# Altium PCB PCB_Clavier.PcbDoc (part 2 of 2)
Units mm, origin at the board's own origin, x right, y up, seen from the top; angles counter-clockwise.
Board outline 291.65 x 101.75 mm, 2 copper layers (Top Layer, Bottom Layer), stack 1.569 mm thick; 306 components, 204 nets, 1059 pads, 0 vias.
Unrouted connection lines stored in the file: 593.
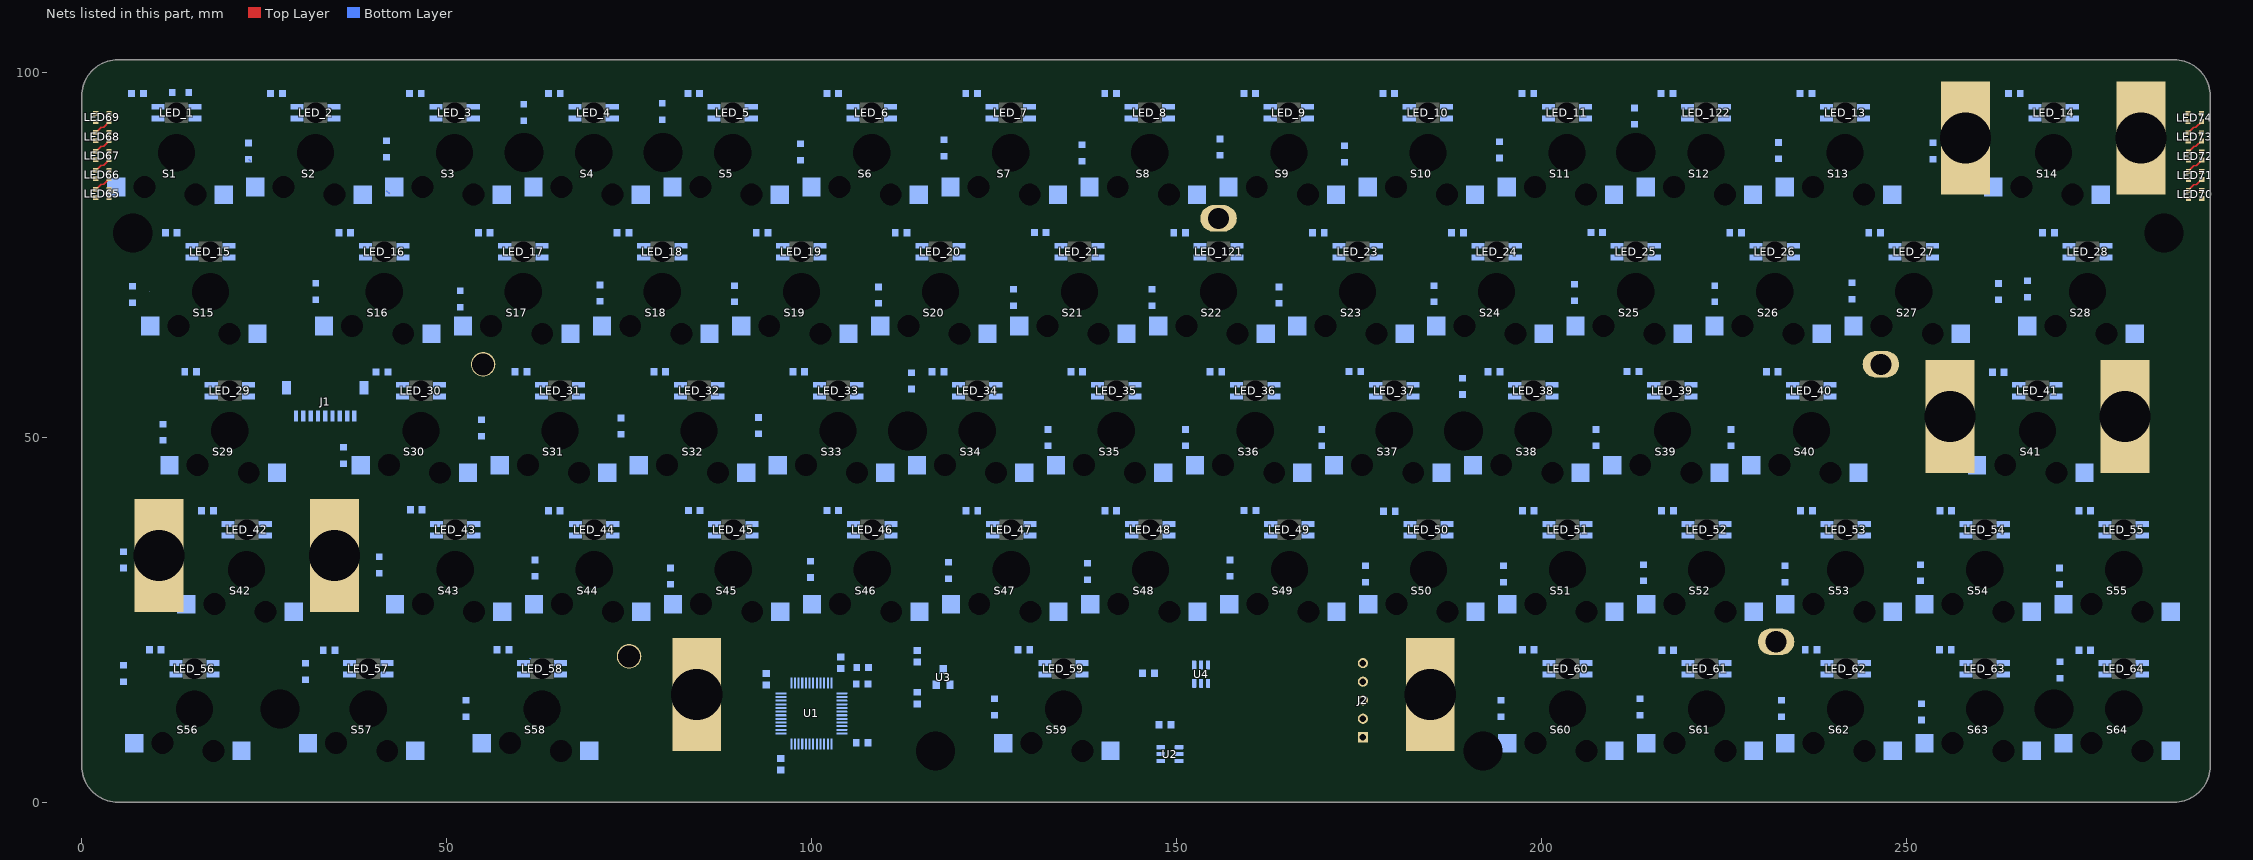
[diagram p2: the nets of this part, all layers, seen from the top]

## Part data
C1 C2 C3 C4 C5 C6 C7 C8 C_1 C_2 C_3 C_4 C_5 C_6 C_7 C_8 C_9 C_10 C_11 C_13 C_14 C_15 C_16 C_17 C_18 C_19 C_20 C_21 C_22 C_23 C_24 C_25 C_26 C_27 C_28 C_29 C_30 C_31 C_32 C_33 C_34 C_35 C_36 C_37 C_38 C_39 C_40 C_41 C_42 C_43 C_44 C_45 C_46 C_47 C_48 C_49 C_50 C_51 C_52 C_53 C_54 C_55 C_56 C_57 C_58 C_59 C_60 C_61 C_62 C_63 C_64 C_121: library part "CAP NP"
D1 D2 D3 D4 D5 D6 D7 D8 D9 D10 D11 D12 D13 D14 D15 D16 D17 D18 D19 D20 D21 D22 D23 D24 D25 D26 D27 D28 D29 D30 D31 D32 D33 D34 D35 D36 D37 D38 D39 D40 D41 D42 D43 D44 D45 D46 D47 D48 D49 D50 D51 D52 D53 D54 D55 D56 D57 D58 D59 D60 D61 D62 D63 D64: library part DIODE
J1: "Connector Header Surface Mount, Right Angle 9 position 0.039 (1.00mm)", Package=None, Check_prices=https://www.snapeda.com/parts/SM09B-SRSS-TB(LF)(SN)/JST/view-part/?ref=eda, MF="JST Sales America Inc.", MP=SM09B-SRSS-TB(LF)(SN), SnapEDA_Link=https://www.snapeda.com/parts/SM09B-SRSS-TB(LF)(SN)/JST/view-part/?ref=snap
J2: library part "HEADER 5"
LED65 LED66 LED67 LED68 LED69 LED70 LED71 LED72 LED73 LED74: "Intelligent control LED light source, SMD-4", Package=Package, Availability="Not in stock", Check_prices=https://www.snapeda.com/parts/WS2812-2020/Worldsemi/view-part/?ref=eda, MF=Worldsemi, MP=WS2812-2020, Price=None, SnapEDA_Link=https://www.snapeda.com/parts/WS2812-2020/Worldsemi/view-part/?ref=snap
MH1 MH2 MH3 MH4 MH5 MH6 MH7 MH8 MH9 MH10 MH11 MH12 MH13 MH14 MH15 MH16 MH17 MH18 MH19 MH20 MH21 MH22 MH23 MH24: library part "Mounting Hole"
R1 R2: library part R
S1 S2 S3 S4 S5 S6 S7 S8 S9 S10 S11 S12 S13 S14 S15 S16 S17 S18 S19 S20 S21 S22 S23 S24 S25 S26 S27 S28 S29 S30 S31 S32 S33 S34 S35 S36 S37 S38 S39 S40 S41 S42 S43 S44 S45 S46 S47 S48 S49 S50 S51 S52 S53 S54 S55 S56 S57 S58 S59 S60 S61 S62 S63 S64: library part "SW PUSHBUTTON"
U2 U4: "Single-Bit Dual-Supply Bus Transceiver with Configurable Voltage-Level Shifting and 3-State Outputs 6-SOT-23 -40 to 85", Package="SOT-23-6 Texas Instruments", Availability=Good, MF="Texas Instruments", MP=SN74LVC1T45DBVR, Price=None, Purchase-URL=https://pricing.snapeda.com/search/part/SN74LVC1T45DBVR/?ref=eda, SnapEDA_Link=https://www.snapeda.com/parts/SN74LVC1T45DBVR/Texas%20Instruments/view-part/106485/?ref=snap
  U2: Check_prices=https://www.snapeda.com/parts/SN74LVC1T45DBVR/Texas%20Instruments/view-part/106485/?ref=eda
U3: library part PMIC-LDO-XC6206P332MR-G(SOT23), "Linear Voltage Regulator IC Positive Fixed 1 Output 200mA SOT-23", Package="SOT-23-3 Torex", Availability="In Stock", Check_prices=https://www.snapeda.com/parts/XC6206P332MR-G/Torex/view-part/?ref=eda, MF=Torex, MP=XC6206P332MR-G, Price=None, Purchase-URL=https://pricing.snapeda.com/search/part/XC6206P332MR-G/?ref=eda, SnapEDA_Link=https://www.snapeda.com/parts/XC6206P332MR-G/Torex/view-part/?ref=snap

## Nets (pads, with @x,y where several pads share a name; then routed paths per layer and width w, separated by ;. In a path a pad name is that pad's centre, name@x,y a point inside that pad or via, vN(x,y) a via of type N, cw(c..) or ccw(c..) an arc to the next point about the centre after c; other vN are vias at no path point)
+3.3V: C1.1 C2.1 C3.1 C4.1 C5.1 C6.1 C8.1 J1.6 J2.1 U1.1 U1.9 U1.24 U1.36 U1.48 U2.1 U2.5 U3.2 U4.1 U4.5
\N\R\S\T\: J2.4 U1.7
BOOT0: J1.7 U1.44
GND: C1.2 C2.2 C3.2 C4.2 C5.2 C6.2 C7.2 C8.2 C_1.2 C_2.2 C_3.2 C_4.2 C_5.2 C_6.2 C_7.2 C_8.2 C_9.2 C_10.2 C_11.2 C_13.2 C_14.2 C_15.2 C_16.2 C_17.2 C_18.2 C_19.2 C_20.2 C_21.2 C_22.2 C_23.2 C_24.2 C_25.2 C_26.2 C_27.2 C_28.2 C_29.2 C_30.2 C_31.2 C_32.2 C_33.2 C_34.2 C_35.2 C_36.2 C_37.2 C_38.2 C_39.2 C_40.2 C_41.2 C_42.2 C_43.2 C_44.2 C_45.2 C_46.2 C_47.2 C_48.2 C_49.2 C_50.2 C_51.2 C_52.2 C_53.2 C_54.2 C_55.2 C_56.2 C_57.2 C_58.2 C_59.2 C_60.2 C_61.2 C_62.2 C_63.2 C_64.2 C_121.2 J1.S1 J1.S2 J2.5 LED65.2 LED66.2 LED67.2 LED68.2 LED69.2 LED70.2 LED71.2 LED72.2 LED73.2 LED74.2 LED_1.1 LED_2.1 LED_3.1 LED_4.1 LED_5.1 LED_6.1 LED_7.1 LED_8.1 LED_9.1 LED_10.1 LED_11.1 LED_13.1 LED_14.1 LED_15.1 LED_16.1 LED_17.1 LED_18.1 LED_19.1 LED_20.1 LED_21.1 LED_23.1 LED_24.1 LED_25.1 LED_26.1 LED_27.1 LED_28.1 LED_29.1 LED_30.1 LED_31.1 LED_32.1 LED_33.1 LED_34.1 LED_35.1 LED_36.1 LED_37.1 LED_38.1 LED_39.1 LED_40.1 LED_41.1 LED_42.1 LED_43.1 LED_44.1 LED_45.1 LED_46.1 LED_47.1 LED_48.1 LED_49.1 LED_50.1 LED_51.1 LED_52.1 LED_53.1 LED_54.1 LED_55.1 LED_56.1 LED_57.1 LED_58.1 LED_59.1 LED_60.1 LED_61.1 LED_62.1 LED_63.1 LED_64.1 LED_121.1 LED_122.1 MH11.1 MH12.1 MH13.1 MH14.1 MH15.1 U1.8 U1.23 U1.35 U1.47 U2.2 U3.1 U4.2
LEDS_O: LED_1.2 R1.2
LEDS_OUT: U1.38 U2.3
LEDS_STAT: U1.16 U4.3
NetD1_1: D1.1 S1.1
NetD2_1: D2.1 S2.1 | length 0.4
  Bottom Layer w0.2: D2.1@22.875,88.075 D2.1@23.145,87.805
NetD3_1: D3.1 S3.1 | length 0.6
  Bottom Layer w0.2: S3.1@41.75,83.795 S3.1@42.195,83.35
NetD4_1: D4.1 S4.1
NetD5_1: D5.1 S5.1
NetD6_1: D6.1 S6.1
NetD7_1: D7.1 S7.1
NetD8_1: D8.1 S8.1
NetD9_1: D9.1 S9.1
NetD10_1: D10.1 S10.1
NetD11_1: D11.1 S11.1
NetD12_1: D12.1 S12.1
NetD13_1: D13.1 S13.1
NetD14_1: D14.1 S14.1
NetD15_1: D15.1 S15.1 | length 0
  Bottom Layer w0.2: 9.295,69.95 9.295,69.975
NetD16_1: D16.1 S16.1
NetD17_1: D17.1 S17.1
NetD18_1: D18.1 S18.1
NetD19_1: D19.1 S19.1
NetD20_1: D20.1 S20.1
NetD21_1: D21.1 S21.1
NetD22_1: D22.1 S22.1
NetD23_1: D23.1 S23.1
NetD24_1: D24.1 S24.1
NetD25_1: D25.1 S25.1
NetD26_1: D26.1 S26.1
NetD27_1: D27.1 S27.1
NetD28_1: D28.1 S28.1
NetD29_1: D29.1 S29.1
NetD30_1: D30.1 S30.1
NetD31_1: D31.1 S31.1
NetD32_1: D32.1 S32.1
NetD33_1: D33.1 S33.1
NetD34_1: D34.1 S34.1
NetD35_1: D35.1 S35.1
NetD36_1: D36.1 S36.1
NetD37_1: D37.1 S37.1
NetD38_1: D38.1 S38.1
NetD39_1: D39.1 S39.1
NetD40_1: D40.1 S40.1
NetD41_1: D41.1 S41.1
NetD42_1: D42.1 S42.1
NetD43_1: D43.1 S43.1
NetD44_1: D44.1 S44.1
NetD45_1: D45.1 S45.1
NetD46_1: D46.1 S46.1
NetD47_1: D47.1 S47.1
NetD48_1: D48.1 S48.1
NetD49_1: D49.1 S49.1
NetD50_1: D50.1 S50.1
NetD51_1: D51.1 S51.1
NetD52_1: D52.1 S52.1
NetD53_1: D53.1 S53.1
NetD54_1: D54.1 S54.1
NetD55_1: D55.1 S55.1
NetD56_1: D56.1 S56.1
NetD57_1: D57.1 S57.1
NetD58_1: D58.1 S58.1
NetD59_1: D59.1 S59.1
NetD60_1: D60.1 S60.1
NetD61_1: D61.1 S61.1
NetD62_1: D62.1 S62.1
NetD63_1: D63.1 S63.1
NetD64_1: D64.1 S64.1
NetJ1_2: J1.2
NetLED65_1: LED65.1 LED66.3 | length 2.5
  Top Layer w0.2: LED65.1@1.935,83.95 2.685,84.7 3.015,84.7 LED66.3@3.765,85.45
NetLED65_3: LED65.3 R2.2
NetLED66_1: LED66.1 LED67.3 | length 2.5
  Top Layer w0.2: LED66.1@1.935,86.55 2.685,87.3 3.015,87.3 LED67.3@3.765,88.05
NetLED67_1: LED67.1 LED68.3 | length 2.5
  Top Layer w0.2: LED67.1@1.935,89.15 2.685,89.9 3.015,89.9 LED68.3@3.765,90.65
NetLED68_1: LED68.1 LED69.3 | length 2.5
  Top Layer w0.2: LED68.1@1.935,91.75 2.698,92.512 3.003,92.512 LED69.3@3.765,93.275
NetLED69_1: LED69.1 LED70.3
NetLED70_1: LED70.1 LED71.3 | length 2.5
  Top Layer w0.2: LED70.1@288.635,83.825 289.398,84.588 289.703,84.588 LED71.3@290.465,85.35
NetLED71_1: LED71.1 LED72.3 | length 2.5
  Top Layer w0.2: LED71.1@288.635,86.45 289.398,87.213 289.702,87.213 LED72.3@290.465,87.975
NetLED72_1: LED72.1 LED73.3 | length 2.5
  Top Layer w0.2: LED72.1@288.635,89.075 289.41,89.85 289.68,89.85 LED73.3@290.455,90.625
NetLED73_1: LED73.1 LED74.3 | length 2.4
  Top Layer w0.2: LED73.1@288.625,91.725 289.388,92.488 289.678,92.488 LED74.3@290.44,93.25
NetLED74_1: LED74.1
NetLED_2_2: LED_1.4 LED_2.2
NetLED_3_2: LED_2.4 LED_3.2
NetLED_4_2: LED_3.4 LED_4.2
NetLED_5_2: LED_4.4 LED_5.2
NetLED_6_2: LED_5.4 LED_6.2
NetLED_7_2: LED_6.4 LED_7.2
NetLED_8_2: LED_7.4 LED_8.2
NetLED_9_2: LED_8.4 LED_9.2
NetLED_10_2: LED_9.4 LED_10.2
NetLED_11_2: LED_10.4 LED_11.2
NetLED_13_2: LED_13.2 LED_122.4
NetLED_14_2: LED_13.4 LED_14.2
NetLED_15_2: LED_14.4 LED_15.2
NetLED_16_2: LED_15.4 LED_16.2
NetLED_17_2: LED_16.4 LED_17.2
NetLED_18_2: LED_17.4 LED_18.2
NetLED_19_2: LED_18.4 LED_19.2
NetLED_20_2: LED_19.4 LED_20.2
NetLED_21_2: LED_20.4 LED_21.2
NetLED_23_2: LED_23.2 LED_121.4
NetLED_24_2: LED_23.4 LED_24.2
NetLED_25_2: LED_24.4 LED_25.2
NetLED_26_2: LED_25.4 LED_26.2
NetLED_27_2: LED_26.4 LED_27.2
NetLED_28_2: LED_27.4 LED_28.2
NetLED_29_2: LED_28.4 LED_29.2
NetLED_30_2: LED_29.4 LED_30.2
NetLED_31_2: LED_30.4 LED_31.2
NetLED_32_2: LED_31.4 LED_32.2
NetLED_33_2: LED_32.4 LED_33.2
NetLED_34_2: LED_33.4 LED_34.2
NetLED_35_2: LED_34.4 LED_35.2
NetLED_36_2: LED_35.4 LED_36.2
NetLED_37_2: LED_36.4 LED_37.2
NetLED_38_2: LED_37.4 LED_38.2
NetLED_39_2: LED_38.4 LED_39.2
NetLED_40_2: LED_39.4 LED_40.2
NetLED_41_2: LED_40.4 LED_41.2
NetLED_42_2: LED_41.4 LED_42.2
NetLED_43_2: LED_42.4 LED_43.2
NetLED_44_2: LED_43.4 LED_44.2
NetLED_45_2: LED_44.4 LED_45.2
NetLED_46_2: LED_45.4 LED_46.2
NetLED_47_2: LED_46.4 LED_47.2
NetLED_48_2: LED_47.4 LED_48.2
NetLED_49_2: LED_48.4 LED_49.2
NetLED_50_2: LED_49.4 LED_50.2
NetLED_51_2: LED_50.4 LED_51.2
NetLED_52_2: LED_51.4 LED_52.2
NetLED_53_2: LED_52.4 LED_53.2
NetLED_54_2: LED_53.4 LED_54.2
NetLED_55_2: LED_54.4 LED_55.2
NetLED_56_2: LED_55.4 LED_56.2
NetLED_57_2: LED_56.4 LED_57.2
NetLED_58_2: LED_57.4 LED_58.2
NetLED_59_2: LED_58.4 LED_59.2
NetLED_60_2: LED_59.4 LED_60.2
NetLED_61_2: LED_60.4 LED_61.2
NetLED_62_2: LED_61.4 LED_62.2
NetLED_63_2: LED_62.4 LED_63.2
NetLED_64_2: LED_63.4 LED_64.2
NetLED_64_4: LED_64.4
NetLED_121_2: LED_21.4 LED_121.2
NetLED_122_2: LED_11.4 LED_122.2
NetMH1_1: MH1.1
NetMH2_1: MH2.1
NetMH3_1: MH3.1
NetMH4_1: MH4.1
NetMH5_1: MH5.1
NetMH6_1: MH6.1
NetMH7_1: MH7.1
NetMH8_1: MH8.1
NetMH9_1: MH9.1
NetMH10_1: MH10.1
NetMH16_1: MH16.1
NetMH17_1: MH17.1
NetMH18_1: MH18.1
NetMH19_1: MH19.1
NetMH20_1: MH20.1
NetMH21_1: MH21.1
NetMH22_1: MH22.1
NetMH23_1: MH23.1
NetMH24_1: MH24.1
NetR1_1: R1.1 U2.4
NetR2_1: R2.1 U4.4
NetS1_2: S1.2 S15.2 S29.2 S42.2 S56.2 U1.18 | length 0
  Bottom Layer w0.2: S1.2@18.805,82.275 S1.2@18.805,82.3
NetS2_2: S2.2 S16.2 S30.2 S43.2 S57.2 U1.19
NetS3_2: S3.2 S17.2 S31.2 S44.2 S58.2 U1.20
NetS4_2: S4.2 S18.2 S32.2 S45.2 U1.39
NetS5_2: S5.2 S19.2 S33.2 S46.2 U1.40
NetS6_2: S6.2 S20.2 S34.2 S47.2 S59.2 U1.41
NetS7_2: S7.2 S21.2 S35.2 S48.2 U1.42
NetS8_2: S8.2 S22.2 S36.2 S49.2 U1.43
NetS9_2: S9.2 S23.2 S37.2 S50.2 U1.45
NetS10_2: S10.2 S24.2 S38.2 S51.2 S60.2 U1.46
NetS11_2: S11.2 S25.2 S39.2 S52.2 S61.2 U1.21
NetS12_2: S12.2 S26.2 S40.2 S53.2 S62.2 U1.22
NetS13_2: S13.2 S27.2 S54.2 S63.2 U1.25
NetS14_2: S14.2 S28.2 S41.2 S55.2 S64.2 U1.26
NetU1_2: U1.2
NetU1_3: U1.3
NetU1_4: U1.4
NetU1_5: U1.5
NetU1_6: U1.6
NetU1_15: U1.15
NetU1_27: U1.27
NetU1_28: U1.28
NetU1_31: U1.31
OS_1: J1.3 U1.17
OS_2: J1.4 U1.29
OS_3: J1.5 U1.30
ROW1: D1.2 D2.2 D3.2 D4.2 D5.2 D6.2 D7.2 D8.2 D9.2 D10.2 D11.2 D12.2 D13.2 D14.2 U1.10
ROW2: D15.2 D16.2 D17.2 D18.2 D19.2 D20.2 D21.2 D22.2 D23.2 D24.2 D25.2 D26.2 D27.2 D28.2 U1.11
ROW3: D29.2 D30.2 D31.2 D32.2 D33.2 D34.2 D35.2 D36.2 D37.2 D38.2 D39.2 D40.2 D41.2 U1.12
ROW4: D42.2 D43.2 D44.2 D45.2 D46.2 D47.2 D48.2 D49.2 D50.2 D51.2 D52.2 D53.2 D54.2 D55.2 U1.13
ROW5: D56.2 D57.2 D58.2 D59.2 D60.2 D61.2 D62.2 D63.2 D64.2 U1.14
SWCLK: J2.3 U1.37
SWDIO: J2.2 U1.34
USBD_+: J1.9 U1.33
USBD_-: J1.8 U1.32 | length 0.1
  Bottom Layer w0.125: 61.398,19.748 61.471,19.675 ; U1.32@95.894,13.003 U1.32@95.898,12.998
VBUS: C7.1 C_1.1 C_2.1 C_3.1 C_4.1 C_5.1 C_6.1 C_7.1 C_8.1 C_9.1 C_10.1 C_11.1 C_13.1 C_14.1 C_15.1 C_16.1 C_17.1 C_18.1 C_19.1 C_20.1 C_21.1 C_22.1 C_23.1 C_24.1 C_25.1 C_26.1 C_27.1 C_28.1 C_29.1 C_30.1 C_31.1 C_32.1 C_33.1 C_34.1 C_35.1 C_36.1 C_37.1 C_38.1 C_39.1 C_40.1 C_41.1 C_42.1 C_43.1 C_44.1 C_45.1 C_46.1 C_47.1 C_48.1 C_49.1 C_50.1 C_51.1 C_52.1 C_53.1 C_54.1 C_55.1 C_56.1 C_57.1 C_58.1 C_59.1 C_60.1 C_61.1 C_62.1 C_63.1 C_64.1 C_121.1 J1.1 LED65.4 LED66.4 LED67.4 LED68.4 LED69.4 LED70.4 LED71.4 LED72.4 LED73.4 LED74.4 LED_1.3 LED_2.3 LED_3.3 LED_4.3 LED_5.3 LED_6.3 LED_7.3 LED_8.3 LED_9.3 LED_10.3 LED_11.3 LED_13.3 LED_14.3 LED_15.3 LED_16.3 LED_17.3 LED_18.3 LED_19.3 LED_20.3 LED_21.3 LED_23.3 LED_24.3 LED_25.3 LED_26.3 LED_27.3 LED_28.3 LED_29.3 LED_30.3 LED_31.3 LED_32.3 LED_33.3 LED_34.3 LED_35.3 LED_36.3 LED_37.3 LED_38.3 LED_39.3 LED_40.3 LED_41.3 LED_42.3 LED_43.3 LED_44.3 LED_45.3 LED_46.3 LED_47.3 LED_48.3 LED_49.3 LED_50.3 LED_51.3 LED_52.3 LED_53.3 LED_54.3 LED_55.3 LED_56.3 LED_57.3 LED_58.3 LED_59.3 LED_60.3 LED_61.3 LED_62.3 LED_63.3 LED_64.3 LED_121.3 LED_122.3 U2.6 U3.3 U4.6
pads on no net: LED_1.0 LED_2.0 LED_3.0 LED_4.0 LED_5.0 LED_6.0 LED_7.0 LED_8.0 LED_9.0 LED_10.0 LED_11.0 LED_13.0 LED_14.0 LED_15.0 LED_16.0 LED_17.0 LED_18.0 LED_19.0 LED_20.0 LED_21.0 LED_23.0 LED_24.0 LED_25.0 LED_26.0 LED_27.0 LED_28.0 LED_29.0 LED_30.0 LED_31.0 LED_32.0 LED_33.0 LED_34.0 LED_35.0 LED_36.0 LED_37.0 LED_38.0 LED_39.0 LED_40.0 LED_41.0 LED_42.0 LED_43.0 LED_44.0 LED_45.0 LED_46.0 LED_47.0 LED_48.0 LED_49.0 LED_50.0 LED_51.0 LED_52.0 LED_53.0 LED_54.0 LED_55.0 LED_56.0 LED_57.0 LED_58.0 LED_59.0 LED_60.0 LED_61.0 LED_62.0 LED_63.0 LED_64.0 LED_121.0 LED_122.0 S1.0 S2.0 S3.0 S4.0 S5.0 S6.0 S7.0 S8.0 S9.0 S10.0 S11.0 S12.0 S13.0 S14.0 S15.0 S16.0 S17.0 S18.0 S19.0 S20.0 S21.0 S22.0 S23.0 S24.0 S25.0 S26.0 S27.0 S28.0 S29.0 S30.0 S31.0 S32.0 S33.0 S34.0 S35.0 S36.0 S37.0 S38.0 S39.0 S40.0 S41.0 S42.0 S43.0 S44.0 S45.0 S46.0 S47.0 S48.0 S49.0 S50.0 S51.0 S52.0 S53.0 S54.0 S55.0 S56.0 S57.0 S58.0 S59.0 S60.0 S61.0 S62.0 S63.0 S64.0

## Silkscreen, mask and mechanical layers (free items; w line width, h text height)
Top Overlay:
  text ".NomDeProjet" at 48,-3.718 h1.5
  text ".Revision" at 50,-4.983 h1.5
Board:
  the board outline again, w0.2
Drill Drawing:
  circle w0.254: c163.74,-24.254 r0.689
  lines w0.25: 86.705,-37 92.976,-37 108.963,-37 117.909,-37 125.025,-37 ; 86.705,-34 92.976,-34 108.963,-34 117.909,-34 125.025,-34 ; 86.705,-31 92.976,-31 108.963,-31 117.909,-31 125.025,-31 ; 86.705,-28 92.976,-28 108.963,-28 117.909,-28 125.025,-28 ; 86.705,-25 92.976,-25 108.963,-25 117.909,-25 125.025,-25 ; 86.705,-22 92.976,-22 108.963,-22 117.909,-22 125.025,-22 ; 86.705,-19 92.976,-19 108.963,-19 117.909,-19 125.025,-19 ; 86.705,-16 92.976,-16 108.963,-16 117.909,-16 125.025,-16 ; 86.705,-13 125.025,-13 ; 92.976,-10 92.976,-40 ; 108.963,-10 108.963,-40 ; 117.909,-10 117.909,-40 ; 161.799,-38.285 256.681,-38.285 ; 161.799,-13.463 256.681,-13.463 ; 169.762,-41.388 169.762,-10.361 ; 177.073,-41.388 177.073,-10.361 ; 191.5,-41.388 191.5,-10.361 ; 197.677,-41.388 197.677,-10.361 ; 206.663,-41.388 206.663,-10.361 ; 223.699,-41.388 223.699,-10.361 ; 231.064,-41.388 231.064,-10.361 ; 240.683,-41.388 240.683,-10.361 ; 92.976,-40 86.705,-40 86.705,-10 125.025,-10 125.025,-40 117.909,-40 ; 92.976,-40 108.963,-40 ; 108.963,-40 117.909,-40 ; 161.799,-41.388 256.681,-41.388 256.681,-10.361 161.799,-10.361 161.799,-41.388
  lines w0.254: 163.05,-37.354 163.05,-37.009 163.395,-36.665 163.05,-36.32 163.05,-35.975 163.395,-35.975 163.74,-36.32 164.084,-35.975 164.429,-35.975 164.429,-36.32 164.084,-36.665 164.429,-37.009 164.429,-37.354 164.084,-37.354 163.74,-37.009 163.395,-37.354 163.05,-37.354 ; 163.05,-34.251 163.74,-33.907 164.429,-34.251 164.084,-33.562 164.429,-32.873 163.74,-33.217 163.05,-32.873 163.395,-33.562 163.05,-34.251 ; 163.05,-31.149 164.429,-31.149 164.429,-29.77 163.05,-29.77 163.05,-31.149 ; 163.05,-27.701 163.395,-27.701 163.395,-28.046 164.084,-28.046 164.084,-27.701 164.429,-27.701 164.429,-27.012 164.084,-27.012 164.084,-26.667 163.395,-26.667 163.395,-27.012 163.05,-27.012 163.05,-27.701 ; 163.05,-21.496 163.395,-21.496 163.74,-21.841 164.084,-21.496 164.429,-21.496 164.084,-21.151 164.429,-20.807 164.084,-20.807 163.74,-20.462 163.395,-20.807 163.05,-20.807 163.395,-21.151 163.05,-21.496 ; 163.05,-17.359 164.429,-17.359 163.74,-18.738 163.05,-17.359 ; 163.05,-14.946 163.74,-15.635 164.429,-14.946 163.74,-14.256 163.05,-14.946
  text "Layer" at 88.205,-12.25 h1.5
  text "Name" at 94.476,-12.25 h1.5
  text "Thickness" at 110.463,-12.25 h1.5
  text "Gerber" at 119.409,-12.25 h1.5
  text "Symbol" at 163.66,-12.533 h1.8
  text "Count" at 170.693,-12.533 h1.8
  text "Hole Size" at 178.004,-12.533 h1.8
  text "Plated" at 192.431,-12.533 h1.8
  text "Hole Type" at 198.608,-12.533 h1.8
  text "Drill Layer Pair" at 207.593,-12.533 h1.8
  text "Via/Pad" at 224.629,-12.533 h1.8
  text "Pad Shape" at 231.995,-12.533 h1.8
  text "Hole Length" at 241.614,-12.533 h1.8
  text "Top Overlay" at 94.476,-15.25 h1.5
  text "GTO" at 119.409,-15.25 h1.5
  text "5" at 170.693,-15.635 h1.5
  text "0.890mm (35.04mil)" at 178.004,-15.635 h1.5
  text "PTH" at 192.431,-15.635 h1.5
  text "Round" at 198.608,-15.635 h1.5
  text "Top Layer - Bottom Layer" at 207.593,-15.635 h1.5
  text "Pad" at 224.629,-15.635 h1.5
  text "Rounded" at 231.995,-15.635 h1.5
  text "-" at 241.614,-15.635 h1.5
  text "Top Solder" at 94.476,-18.25 h1.5
  text "0.025mm" at 110.463,-18.25 h1.5
  text "GTS" at 119.409,-18.25 h1.5
  text "64" at 170.693,-18.738 h1.5
  text "2.800mm (110.24mil)" at 178.004,-18.738 h1.5
  text "NPTH" at 192.431,-18.738 h1.5
  text "Rectangle" at 198.608,-18.738 h1.5
  text "Top Layer - Bottom Layer" at 207.593,-18.738 h1.5
  text "Pad" at 224.629,-18.738 h1.5
  text "Rounded" at 231.995,-18.738 h1.5
  text "3.200mm (125.98mil)" at 241.614,-18.738 h1.5
  text "Top Surface Finish" at 94.476,-21.25 h1.5
  text "0.020mm" at 110.463,-21.25 h1.5
  text "3" at 170.693,-21.841 h1.5
  text "2.900mm (114.17mil)" at 178.004,-21.841 h1.5
  text "PTH" at 192.431,-21.841 h1.5
  text "Slot" at 198.608,-21.841 h1.5
  text "Top Layer - Bottom Layer" at 207.593,-21.841 h1.5
  text "Pad" at 224.629,-21.841 h1.5
  text "Rounded" at 231.995,-21.841 h1.5
  text "3.900mm (153.54mil)" at 241.614,-21.841 h1.5
  text "1" at 88.205,-24.25 h1.5
  text "Top Layer" at 94.476,-24.25 h1.5
  text "0.035mm" at 110.463,-24.25 h1.5
  text "GTL" at 119.409,-24.25 h1.5
  text "128" at 170.693,-24.943 h1.5
  text "3.000mm (118.11mil)" at 178.004,-24.943 h1.5
  text "NPTH" at 192.431,-24.943 h1.5
  text "Round" at 198.608,-24.943 h1.5
  text "Top Layer - Bottom Layer" at 207.593,-24.943 h1.5
  text "Pad" at 224.629,-24.943 h1.5
  text "Rounded" at 231.995,-24.943 h1.5
  text "-" at 241.614,-24.943 h1.5
  text "Dielectric 1" at 94.476,-27.25 h1.5
  text "1.499mm" at 110.463,-27.25 h1.5
  text "2" at 170.693,-28.046 h1.5
  text "3.000mm (118.11mil)" at 178.004,-28.046 h1.5
  text "PTH" at 192.431,-28.046 h1.5
  text "Round" at 198.608,-28.046 h1.5
  text "Top Layer - Bottom Layer" at 207.593,-28.046 h1.5
  text "Pad" at 224.629,-28.046 h1.5
  text "Rounded" at 231.995,-28.046 h1.5
  text "-" at 241.614,-28.046 h1.5
  text "2" at 88.204,-30.25 h1.5
  text "Bottom Layer" at 94.476,-30.25 h1.5
  text "0.035mm" at 110.463,-30.25 h1.5
  text "GBL" at 119.409,-30.25 h1.5
  text "64" at 170.693,-31.149 h1.5
  text "5.100mm (200.79mil)" at 178.004,-31.149 h1.5
  text "NPTH" at 192.431,-31.149 h1.5
  text "Round" at 198.608,-31.149 h1.5
  text "Top Layer - Bottom Layer" at 207.593,-31.149 h1.5
  text "Pad" at 224.629,-31.149 h1.5
  text "Rounded" at 231.995,-31.149 h1.5
  text "-" at 241.614,-31.149 h1.5
  text "Bottom Surface Finish" at 94.476,-33.25 h1.5
  text "0.020mm" at 110.463,-33.25 h1.5
  text "11" at 170.693,-34.251 h1.5
  text "5.350mm (210.63mil)" at 178.004,-34.251 h1.5
  text "NPTH" at 192.431,-34.251 h1.5
  text "Round" at 198.608,-34.251 h1.5
  text "Top Layer - Bottom Layer" at 207.593,-34.251 h1.5
  text "Pad" at 224.629,-34.251 h1.5
  text "Rounded" at 231.995,-34.251 h1.5
  text "-" at 241.614,-34.251 h1.5
  text "Bottom Solder" at 94.476,-36.25 h1.5
  text "0.025mm" at 110.463,-36.25 h1.5
  text "GBS" at 119.409,-36.25 h1.5
  text "8" at 170.693,-37.354 h1.5
  text "7.000mm (275.59mil)" at 178.004,-37.354 h1.5
  text "NPTH" at 192.431,-37.354 h1.5
  text "Rectangle" at 198.608,-37.354 h1.5
  text "Top Layer - Bottom Layer" at 207.593,-37.354 h1.5
  text "Pad" at 224.629,-37.354 h1.5
  text "Rectangle" at 231.995,-37.354 h1.5
  text "15.850mm (624.02mil)" at 241.614,-37.354 h1.5
  text "Bottom Overlay" at 94.476,-39.25 h1.5
  text "GBO" at 119.409,-39.25 h1.5
  text "285 Total" at 170.693,-40.457 h1.5
  text "Total board thickness:" at 88.205,-42.25 h1.5
  text "1.659mm" at 110.463,-42.25 h1.5
  text "Slot definitions :" at 163.66,-42.629 h1.5
  text "Routed Path Length" at 173.87,-42.629 h1.5
  text "= Calculated from tool start centre position to tool end centre position." at 186.52,-42.629 h1.5
  text "Hole Length" at 173.87,-43.87 h1.5
  text "= Routed Path Length + Tool Size = Slot length as defined in the PCB layout" at 181.824,-43.87 h1.5

## Dimensions
0,96.75 to 291.65,96.75 on Drill Drawing
5,0 to 5,101.75 on Drill Drawing

## Text inside footprints (layer, text, board x,y; h text height)
LED_1: Bottom Overlay "VDD" at 9.444,94.881 h0.89; Bottom Overlay "DOUT" at 9.444,93.23 h0.89; Bottom Overlay "DIN" at 18.842,94.881 h0.89; Bottom Overlay "GND" at 18.969,93.23 h0.89
LED_2: Bottom Overlay "VDD" at 28.494,94.881 h0.89; Bottom Overlay "DOUT" at 28.494,93.23 h0.89; Bottom Overlay "DIN" at 37.892,94.881 h0.89; Bottom Overlay "GND" at 38.019,93.23 h0.89
LED_3: Bottom Overlay "VDD" at 47.544,94.881 h0.89; Bottom Overlay "DOUT" at 47.544,93.23 h0.89; Bottom Overlay "DIN" at 56.942,94.881 h0.89; Bottom Overlay "GND" at 57.069,93.23 h0.89
LED_4: Bottom Overlay "VDD" at 66.594,94.881 h0.89; Bottom Overlay "DOUT" at 66.594,93.23 h0.89; Bottom Overlay "DIN" at 75.992,94.881 h0.89; Bottom Overlay "GND" at 76.119,93.23 h0.89
LED_5: Bottom Overlay "VDD" at 85.644,94.881 h0.89; Bottom Overlay "DOUT" at 85.644,93.23 h0.89; Bottom Overlay "DIN" at 95.042,94.881 h0.89; Bottom Overlay "GND" at 95.169,93.23 h0.89
LED_6: Bottom Overlay "VDD" at 104.694,94.881 h0.89; Bottom Overlay "DOUT" at 104.694,93.23 h0.89; Bottom Overlay "DIN" at 114.092,94.881 h0.89; Bottom Overlay "GND" at 114.219,93.23 h0.89
LED_7: Bottom Overlay "VDD" at 123.744,94.881 h0.89; Bottom Overlay "DOUT" at 123.744,93.23 h0.89; Bottom Overlay "DIN" at 133.142,94.881 h0.89; Bottom Overlay "GND" at 133.269,93.23 h0.89
LED_8: Bottom Overlay "VDD" at 142.794,94.881 h0.89; Bottom Overlay "DOUT" at 142.794,93.23 h0.89; Bottom Overlay "DIN" at 152.192,94.881 h0.89; Bottom Overlay "GND" at 152.319,93.23 h0.89
LED_9: Bottom Overlay "VDD" at 161.844,94.881 h0.89; Bottom Overlay "DOUT" at 161.844,93.23 h0.89; Bottom Overlay "DIN" at 171.242,94.881 h0.89; Bottom Overlay "GND" at 171.369,93.23 h0.89
LED_10: Bottom Overlay "VDD" at 180.894,94.881 h0.89; Bottom Overlay "DOUT" at 180.894,93.23 h0.89; Bottom Overlay "DIN" at 190.292,94.881 h0.89; Bottom Overlay "GND" at 190.419,93.23 h0.89
LED_11: Bottom Overlay "VDD" at 199.944,94.881 h0.89; Bottom Overlay "DOUT" at 199.944,93.23 h0.89; Bottom Overlay "DIN" at 209.342,94.881 h0.89; Bottom Overlay "GND" at 209.469,93.23 h0.89
LED_13: Bottom Overlay "VDD" at 238.044,94.881 h0.89; Bottom Overlay "DOUT" at 238.044,93.23 h0.89; Bottom Overlay "DIN" at 247.442,94.881 h0.89; Bottom Overlay "GND" at 247.569,93.23 h0.89
LED_14: Bottom Overlay "GND" at 276.144,93.23 h0.89; Bottom Overlay "DIN" at 276.017,94.881 h0.89; Bottom Overlay "DOUT" at 266.619,93.23 h0.89; Bottom Overlay "VDD" at 266.619,94.881 h0.89
LED_15: Bottom Overlay "VDD" at 14.094,75.831 h0.89; Bottom Overlay "DOUT" at 14.094,74.18 h0.89; Bottom Overlay "DIN" at 23.492,75.831 h0.89; Bottom Overlay "GND" at 23.619,74.18 h0.89
LED_16: Bottom Overlay "VDD" at 37.907,75.831 h0.89; Bottom Overlay "DOUT" at 37.907,74.18 h0.89; Bottom Overlay "DIN" at 47.305,75.831 h0.89; Bottom Overlay "GND" at 47.432,74.18 h0.89
LED_17: Bottom Overlay "VDD" at 56.957,75.831 h0.89; Bottom Overlay "DOUT" at 56.957,74.18 h0.89; Bottom Overlay "DIN" at 66.355,75.831 h0.89; Bottom Overlay "GND" at 66.482,74.18 h0.89
LED_18: Bottom Overlay "VDD" at 76.007,75.831 h0.89; Bottom Overlay "DOUT" at 76.007,74.18 h0.89; Bottom Overlay "DIN" at 85.405,75.831 h0.89; Bottom Overlay "GND" at 85.532,74.18 h0.89
LED_19: Bottom Overlay "VDD" at 95.057,75.831 h0.89; Bottom Overlay "DOUT" at 95.057,74.18 h0.89; Bottom Overlay "DIN" at 104.455,75.831 h0.89; Bottom Overlay "GND" at 104.582,74.18 h0.89
LED_20: Bottom Overlay "VDD" at 114.107,75.831 h0.89; Bottom Overlay "DOUT" at 114.107,74.18 h0.89; Bottom Overlay "DIN" at 123.505,75.831 h0.89; Bottom Overlay "GND" at 123.632,74.18 h0.89
LED_21: Bottom Overlay "VDD" at 133.157,75.831 h0.89; Bottom Overlay "DOUT" at 133.157,74.18 h0.89; Bottom Overlay "DIN" at 142.555,75.831 h0.89; Bottom Overlay "GND" at 142.682,74.18 h0.89
LED_23: Bottom Overlay "VDD" at 171.257,75.831 h0.89; Bottom Overlay "DOUT" at 171.257,74.18 h0.89; Bottom Overlay "DIN" at 180.655,75.831 h0.89; Bottom Overlay "GND" at 180.782,74.18 h0.89
LED_24: Bottom Overlay "VDD" at 190.307,75.831 h0.89; Bottom Overlay "DOUT" at 190.307,74.18 h0.89; Bottom Overlay "DIN" at 199.705,75.831 h0.89; Bottom Overlay "GND" at 199.832,74.18 h0.89
LED_25: Bottom Overlay "VDD" at 209.357,75.831 h0.89; Bottom Overlay "DOUT" at 209.357,74.18 h0.89; Bottom Overlay "DIN" at 218.755,75.831 h0.89; Bottom Overlay "GND" at 218.882,74.18 h0.89
LED_26: Bottom Overlay "VDD" at 228.407,75.831 h0.89; Bottom Overlay "DOUT" at 228.407,74.18 h0.89; Bottom Overlay "DIN" at 237.805,75.831 h0.89; Bottom Overlay "GND" at 237.932,74.18 h0.89
LED_27: Bottom Overlay "VDD" at 247.457,75.831 h0.89; Bottom Overlay "DOUT" at 247.457,74.18 h0.89; Bottom Overlay "DIN" at 256.855,75.831 h0.89; Bottom Overlay "GND" at 256.982,74.18 h0.89
LED_28: Bottom Overlay "VDD" at 271.269,75.831 h0.89; Bottom Overlay "DOUT" at 271.269,74.18 h0.89; Bottom Overlay "DIN" at 280.667,75.831 h0.89; Bottom Overlay "GND" at 280.794,74.18 h0.89
LED_29: Bottom Overlay "VDD" at 16.744,56.781 h0.89; Bottom Overlay "DOUT" at 16.744,55.13 h0.89; Bottom Overlay "DIN" at 26.142,56.781 h0.89; Bottom Overlay "GND" at 26.269,55.13 h0.89
LED_30: Bottom Overlay "VDD" at 42.938,56.781 h0.89; Bottom Overlay "DOUT" at 42.938,55.13 h0.89; Bottom Overlay "DIN" at 52.336,56.781 h0.89; Bottom Overlay "GND" at 52.463,55.13 h0.89
LED_31: Bottom Overlay "VDD" at 61.988,56.781 h0.89; Bottom Overlay "DOUT" at 61.988,55.13 h0.89; Bottom Overlay "DIN" at 71.386,56.781 h0.89; Bottom Overlay "GND" at 71.513,55.13 h0.89
LED_32: Bottom Overlay "VDD" at 81.038,56.781 h0.89; Bottom Overlay "DOUT" at 81.038,55.13 h0.89; Bottom Overlay "DIN" at 90.436,56.781 h0.89; Bottom Overlay "GND" at 90.563,55.13 h0.89
LED_33: Bottom Overlay "VDD" at 100.088,56.781 h0.89; Bottom Overlay "DOUT" at 100.088,55.13 h0.89; Bottom Overlay "DIN" at 109.486,56.781 h0.89; Bottom Overlay "GND" at 109.613,55.13 h0.89
LED_34: Bottom Overlay "VDD" at 119.138,56.781 h0.89; Bottom Overlay "DOUT" at 119.138,55.13 h0.89; Bottom Overlay "DIN" at 128.536,56.781 h0.89; Bottom Overlay "GND" at 128.663,55.13 h0.89
LED_35: Bottom Overlay "VDD" at 138.188,56.781 h0.89; Bottom Overlay "DOUT" at 138.188,55.13 h0.89; Bottom Overlay "DIN" at 147.586,56.781 h0.89; Bottom Overlay "GND" at 147.713,55.13 h0.89
LED_36: Bottom Overlay "VDD" at 157.238,56.781 h0.89; Bottom Overlay "DOUT" at 157.238,55.13 h0.89; Bottom Overlay "DIN" at 166.636,56.781 h0.89; Bottom Overlay "GND" at 166.763,55.13 h0.89
LED_37: Bottom Overlay "VDD" at 176.288,56.781 h0.89; Bottom Overlay "DOUT" at 176.288,55.13 h0.89; Bottom Overlay "DIN" at 185.686,56.781 h0.89; Bottom Overlay "GND" at 185.813,55.13 h0.89
LED_38: Bottom Overlay "VDD" at 195.338,56.781 h0.89; Bottom Overlay "DOUT" at 195.338,55.13 h0.89; Bottom Overlay "DIN" at 204.736,56.781 h0.89; Bottom Overlay "GND" at 204.863,55.13 h0.89
LED_39: Bottom Overlay "VDD" at 214.388,56.781 h0.89; Bottom Overlay "DOUT" at 214.388,55.13 h0.89; Bottom Overlay "DIN" at 223.786,56.781 h0.89; Bottom Overlay "GND" at 223.913,55.13 h0.89
LED_40: Bottom Overlay "VDD" at 233.438,56.781 h0.89; Bottom Overlay "DOUT" at 233.438,55.13 h0.89; Bottom Overlay "DIN" at 242.836,56.781 h0.89; Bottom Overlay "GND" at 242.963,55.13 h0.89
LED_41: Bottom Overlay "VDD" at 264.394,56.781 h0.89; Bottom Overlay "DOUT" at 264.394,55.13 h0.89; Bottom Overlay "DIN" at 273.792,56.781 h0.89; Bottom Overlay "GND" at 273.919,55.13 h0.89
LED_42: Bottom Overlay "VDD" at 19.044,37.731 h0.89; Bottom Overlay "DOUT" at 19.044,36.08 h0.89; Bottom Overlay "DIN" at 28.442,37.731 h0.89; Bottom Overlay "GND" at 28.569,36.08 h0.89
LED_43: Bottom Overlay "VDD" at 47.619,37.731 h0.89; Bottom Overlay "DOUT" at 47.619,36.08 h0.89; Bottom Overlay "DIN" at 57.017,37.731 h0.89; Bottom Overlay "GND" at 57.144,36.08 h0.89
LED_44: Bottom Overlay "VDD" at 66.669,37.731 h0.89; Bottom Overlay "DOUT" at 66.669,36.08 h0.89; Bottom Overlay "DIN" at 76.067,37.731 h0.89; Bottom Overlay "GND" at 76.194,36.08 h0.89
LED_45: Bottom Overlay "VDD" at 85.719,37.731 h0.89; Bottom Overlay "DOUT" at 85.719,36.08 h0.89; Bottom Overlay "DIN" at 95.117,37.731 h0.89; Bottom Overlay "GND" at 95.244,36.08 h0.89
LED_46: Bottom Overlay "VDD" at 104.769,37.731 h0.89; Bottom Overlay "DOUT" at 104.769,36.08 h0.89; Bottom Overlay "DIN" at 114.167,37.731 h0.89; Bottom Overlay "GND" at 114.294,36.08 h0.89
LED_47: Bottom Overlay "VDD" at 123.819,37.731 h0.89; Bottom Overlay "DOUT" at 123.819,36.08 h0.89; Bottom Overlay "DIN" at 133.217,37.731 h0.89; Bottom Overlay "GND" at 133.344,36.08 h0.89
LED_48: Bottom Overlay "VDD" at 142.869,37.731 h0.89; Bottom Overlay "DOUT" at 142.869,36.08 h0.89; Bottom Overlay "DIN" at 152.267,37.731 h0.89; Bottom Overlay "GND" at 152.394,36.08 h0.89
LED_49: Bottom Overlay "VDD" at 161.919,37.731 h0.89; Bottom Overlay "DOUT" at 161.919,36.08 h0.89; Bottom Overlay "DIN" at 171.317,37.731 h0.89; Bottom Overlay "GND" at 171.444,36.08 h0.89
LED_50: Bottom Overlay "VDD" at 180.969,37.731 h0.89; Bottom Overlay "DOUT" at 180.969,36.08 h0.89; Bottom Overlay "DIN" at 190.367,37.731 h0.89; Bottom Overlay "GND" at 190.494,36.08 h0.89
LED_51: Bottom Overlay "VDD" at 200.019,37.731 h0.89; Bottom Overlay "DOUT" at 200.019,36.08 h0.89; Bottom Overlay "DIN" at 209.417,37.731 h0.89; Bottom Overlay "GND" at 209.544,36.08 h0.89
LED_52: Bottom Overlay "VDD" at 219.069,37.731 h0.89; Bottom Overlay "DOUT" at 219.069,36.08 h0.89; Bottom Overlay "DIN" at 228.467,37.731 h0.89; Bottom Overlay "GND" at 228.594,36.08 h0.89
LED_53: Bottom Overlay "VDD" at 238.119,37.731 h0.89; Bottom Overlay "DOUT" at 238.119,36.08 h0.89; Bottom Overlay "DIN" at 247.517,37.731 h0.89; Bottom Overlay "GND" at 247.644,36.08 h0.89
LED_54: Bottom Overlay "VDD" at 257.169,37.731 h0.89; Bottom Overlay "DOUT" at 257.169,36.08 h0.89; Bottom Overlay "DIN" at 266.567,37.731 h0.89; Bottom Overlay "GND" at 266.694,36.08 h0.89
LED_55: Bottom Overlay "VDD" at 276.219,37.731 h0.89; Bottom Overlay "DOUT" at 276.219,36.08 h0.89; Bottom Overlay "DIN" at 285.617,37.731 h0.89; Bottom Overlay "GND" at 285.744,36.08 h0.89
LED_56: Bottom Overlay "GND" at 21.425,17.03 h0.89; Bottom Overlay "DIN" at 21.298,18.681 h0.89; Bottom Overlay "DOUT" at 11.9,17.03 h0.89; Bottom Overlay "VDD" at 11.9,18.681 h0.89
LED_57: Bottom Overlay "VDD" at 35.713,18.681 h0.89; Bottom Overlay "DOUT" at 35.713,17.03 h0.89; Bottom Overlay "DIN" at 45.111,18.681 h0.89; Bottom Overlay "GND" at 45.238,17.03 h0.89
LED_58: Bottom Overlay "VDD" at 59.525,18.681 h0.89; Bottom Overlay "DOUT" at 59.525,17.03 h0.89; Bottom Overlay "DIN" at 68.923,18.681 h0.89; Bottom Overlay "GND" at 69.05,17.03 h0.89
LED_59: Bottom Overlay "VDD" at 130.963,18.681 h0.89; Bottom Overlay "DOUT" at 130.963,17.03 h0.89; Bottom Overlay "DIN" at 140.361,18.681 h0.89; Bottom Overlay "GND" at 140.488,17.03 h0.89
LED_60: Bottom Overlay "VDD" at 200.019,18.681 h0.89; Bottom Overlay "DOUT" at 200.019,17.03 h0.89; Bottom Overlay "DIN" at 209.417,18.681 h0.89; Bottom Overlay "GND" at 209.544,17.03 h0.89
LED_61: Bottom Overlay "VDD" at 219.069,18.681 h0.89; Bottom Overlay "DOUT" at 219.069,17.03 h0.89; Bottom Overlay "DIN" at 228.467,18.681 h0.89; Bottom Overlay "GND" at 228.594,17.03 h0.89
LED_62: Bottom Overlay "VDD" at 238.119,18.681 h0.89; Bottom Overlay "DOUT" at 238.119,17.03 h0.89; Bottom Overlay "DIN" at 247.517,18.681 h0.89; Bottom Overlay "GND" at 247.644,17.03 h0.89
LED_63: Bottom Overlay "VDD" at 257.169,18.681 h0.89; Bottom Overlay "DOUT" at 257.169,17.03 h0.89; Bottom Overlay "DIN" at 266.567,18.681 h0.89; Bottom Overlay "GND" at 266.694,17.03 h0.89
LED_64: Bottom Overlay "VDD" at 276.219,18.681 h0.89; Bottom Overlay "DOUT" at 276.219,17.03 h0.89; Bottom Overlay "DIN" at 285.617,18.681 h0.89; Bottom Overlay "GND" at 285.744,17.03 h0.89
LED_121: Bottom Overlay "VDD" at 152.207,75.831 h0.89; Bottom Overlay "DOUT" at 152.207,74.18 h0.89; Bottom Overlay "DIN" at 161.605,75.831 h0.89; Bottom Overlay "GND" at 161.732,74.18 h0.89
LED_122: Bottom Overlay "VDD" at 218.994,94.881 h0.89; Bottom Overlay "DOUT" at 218.994,93.23 h0.89; Bottom Overlay "DIN" at 228.392,94.881 h0.89; Bottom Overlay "GND" at 228.519,93.23 h0.89